# Altium PCB sensors_pcb.PcbDoc
Units mil, origin at the board's own origin, x right, y up, seen from the top; angles counter-clockwise.
Board outline 1491.26 x 1902.36 mil, 2 copper layers (Top Layer, Bottom Layer); 10 components, 10 nets, 27 pads, 0 vias.
Unrouted connection lines stored in the file: 14.
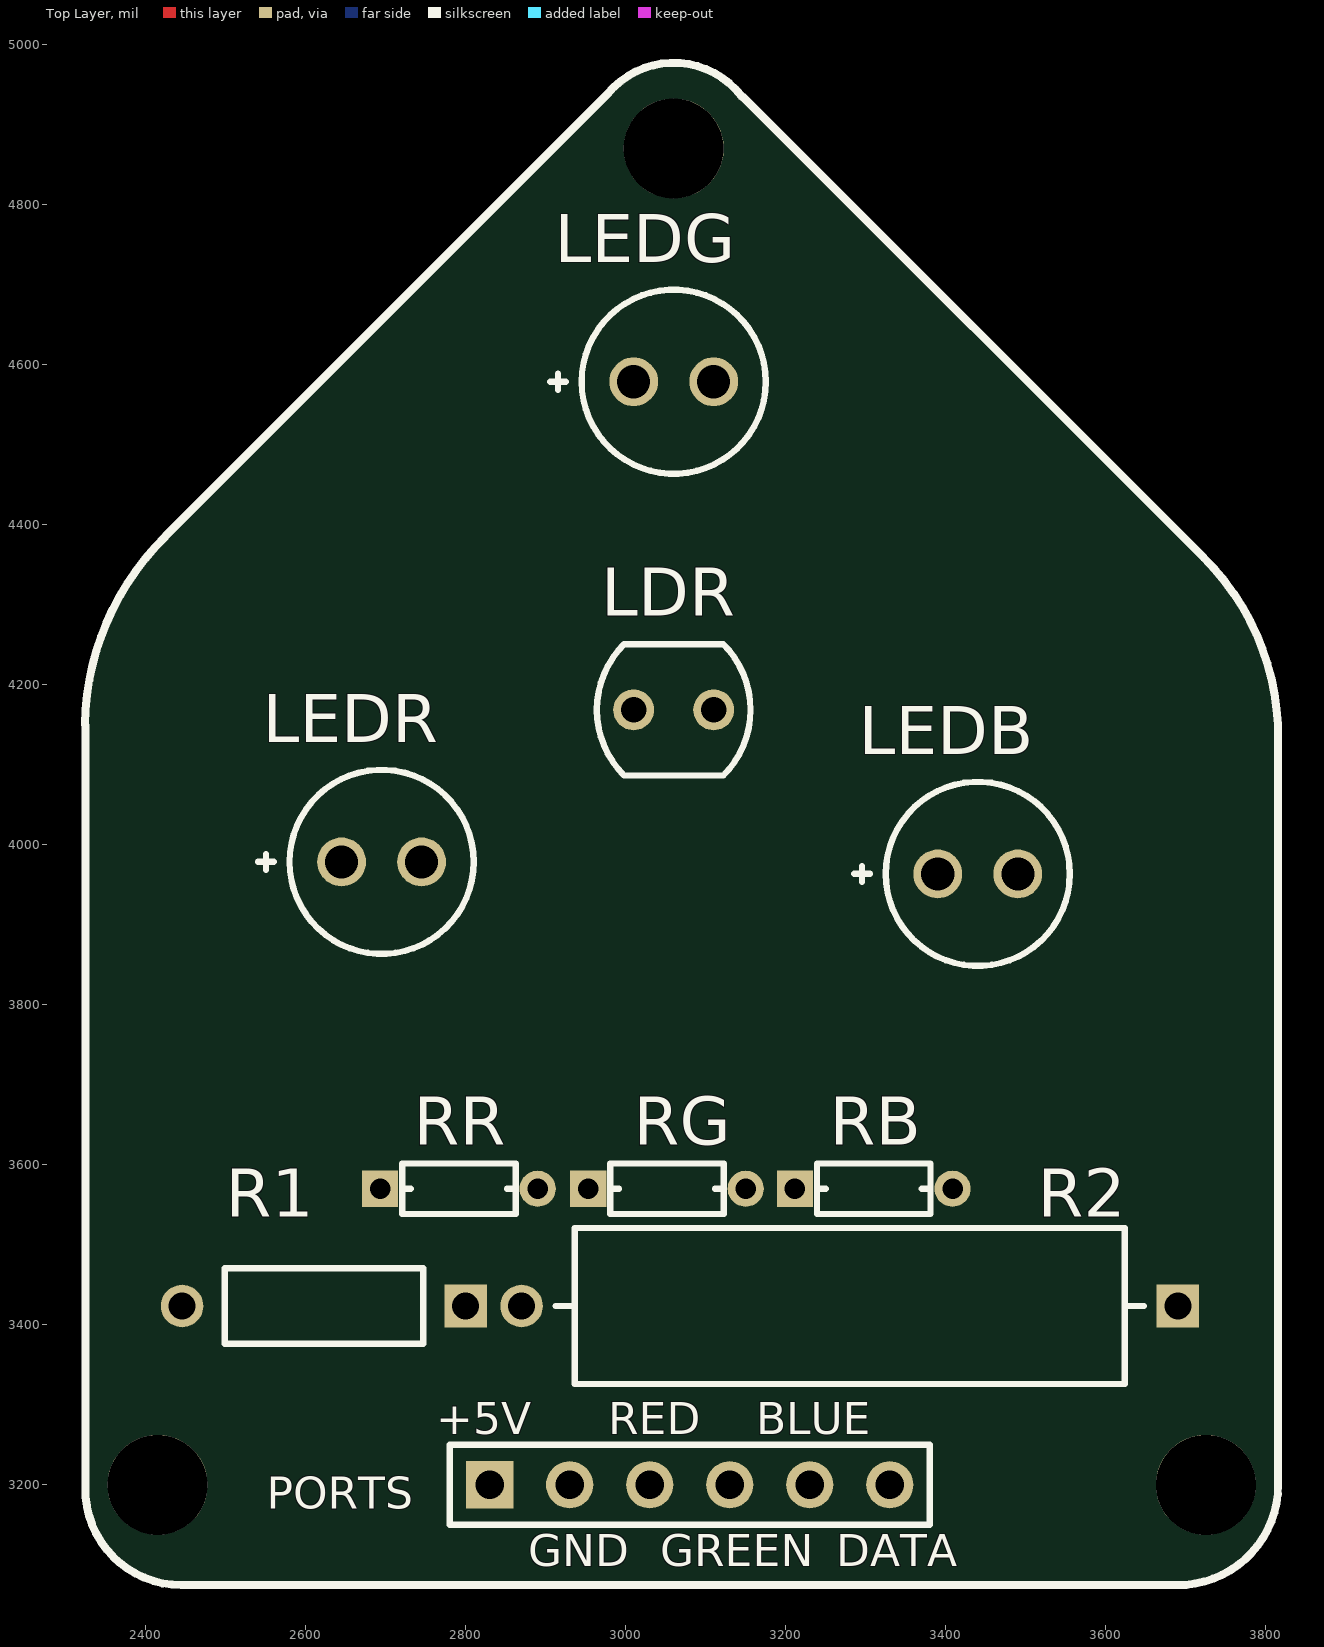
[diagram p0: Top Layer view]
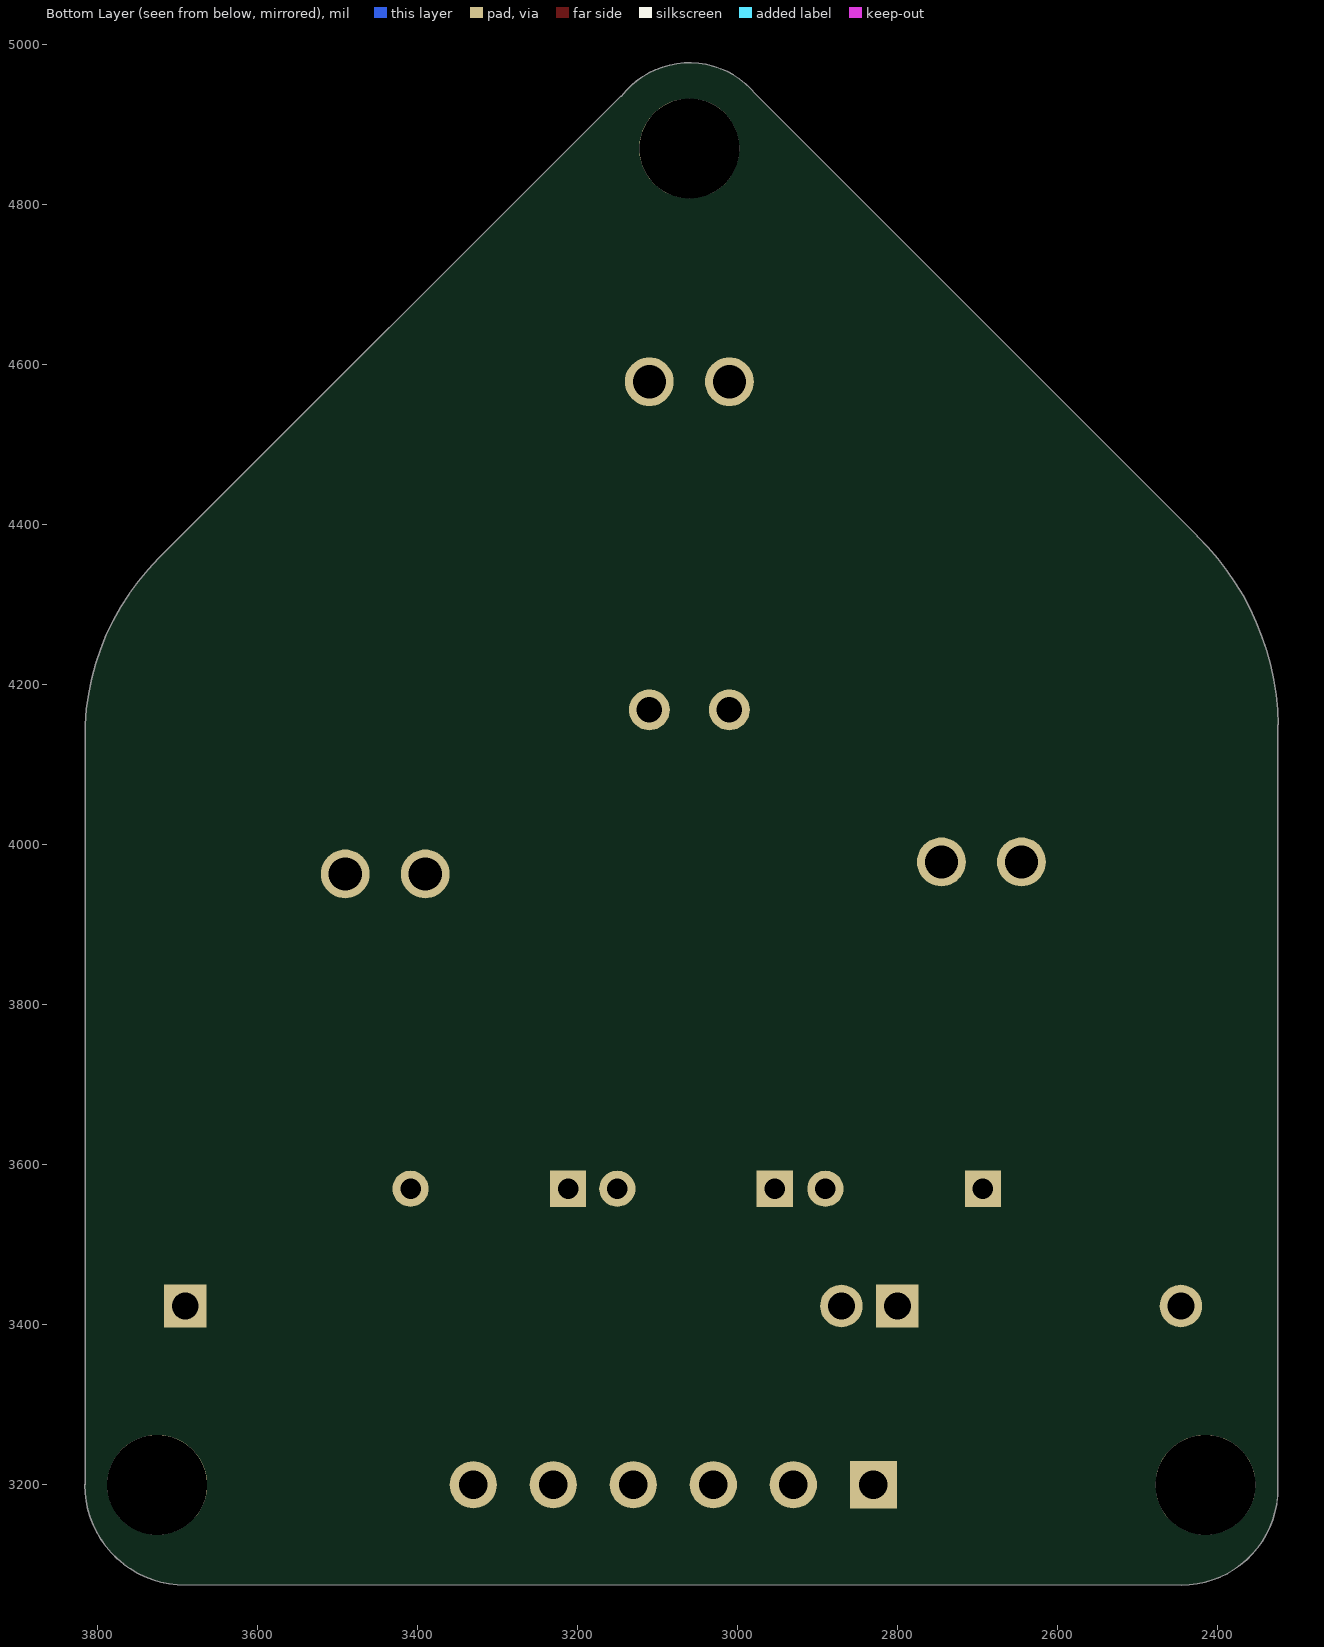
[diagram p1: Bottom Layer view, seen from below]

## Layer stack, top to bottom
Top Solder: solder mask 0.4, Solder Resist, Dk 3.5
Top Layer: signal copper 1.4
Dielectric 1: dielectric 12.6, FR-4, Dk 4.8
Bottom Layer: signal copper 1.4
Bottom Solder: solder mask 0.4, Solder Resist, Dk 3.5

## Board outline
2445,3074.58 cw(c2445,3195) 2325,3185 2325,4149.16 2324.14,4150.01 cw(c2660,4145) 2425,4385 2425,4385.62 2977.4,4938.02 cw(c3060,4870) 3145,4935 3145.98,4935 3722.99,4357.99 cw(c3500,4135) 3815,4150 3815,3200.4 3815.4,3200 cw(c3690,3200) 3700,3075

## Design rules (kind name [scope] priority, off if disabled: settings)
Clearance [All] p1: gap=10 ignorepadtopadclearanceinfootprint=FALSE except(0: Arc-Hole Track-Hole SMDPad-Hole THPad-Hole Via-Hole Fill-Hole Poly-Hole Region-Hole Text-Hole)
PolygonConnect [All] p1: connectstyle=Relief reliefconductorwidth=10 reliefentries=4 polygonreliefangle="90 Angle" airgapwidth=10
RoutingVias [All] p1: holewidth=28 width=50 viastyle="Through Hole" minholewidth=28 minwidth=50 maxholewidth=28 maxwidth=50
SolderMaskExpansion [All] p1: expansion=4 istentingtop=FALSE
Width [All] p1: maxlimit=10 minlimit=10 preferedwidth=10
30 further rules are at their usual default settings.

## Components (designator, comment, footprint, x,y, rotation, side; value= is the part's Value field where it differs from the comment)
LDR "VT90N1" EXCE-VT90N1 3060,4168.43 r0 top
LEDB "HLMP-4740" AVAG-HLMP-4740 3440,3963.43 r0 top
LEDG "HLMP-4740" AVAG-HLMP-4740 3060,4578.43 r0 top
LEDR "HLMP-4740" AVAG-HLMP-4740 2695,3978.43 r0 top
PORTS "Header 6" HDR1X6 2830,3200 r0 top (schematic designator P1)
R1 "MFR-25FBF52-475R" RESA60-630X240 2622.83,3423.43 r180 top (schematic designator "R1 3.01K")
R2 "RNC65H3011FRB14" FP-RNC65-MFG 3280,3423.43 r180 top value=3.01kΩ (schematic designator "R2 475R")
RB "MBA02040C2200FC100" FP-MBA0204-MFG 3310,3570 r0 top value=220Ω
RG "MBA02040C2200FC100" FP-MBA0204-MFG 3051.57,3570 r0 top value=220Ω
RR "MBA02040C2200FC100" FP-MBA0204-MFG 2791.57,3570 r0 top value=220Ω

## Footprints (in the part's own frame and the unit in brackets; to place one, negate y for a bottom-side part, rotate by r counter-clockwise, add the part's x,y. Pads: shape width x height; smd on the part's side, far side on the other; paste and mask are expansions set on the pad)
AVAG-HLMP-4740 [mm] "THD, 2-Leads, Dia 5.845mm, Pitch 2.54mm"
  round 1.55 hole 1.05: 1(-1.27,0) 2(1.27,0)
  silkscreen extent -3.92,-2.92 2.92,2.92
EXCE-VT90N1 [mm] "THD, 2-Leads, Body Width 4.17mm (Max), Height 2.29mm"
  round 1.3 hole 0.8: 1(-1.27,0) 2(1.27,0)
  silkscreen extent -2.44,-2.08 2.44,2.08, body extent -2.44,-2.09 2.44,2.09, height 2.29
FP-MBA0204-MFG [mm]
  rect 1.15x1.15 hole 0.65 paste-1000 mask+0: 1(-2.5,0)
  round 1.15 hole 0.65 paste-1000 mask+0: 2(2.5,0)
  silkscreen extent -1.8,-0.8 1.8,0.8, body extent -3.17,-0.9 3.17,0.9, height 0.25
FP-RNC65-MFG [mm]
  rect 1.35x1.35 hole 0.85 paste-1000 mask+0: 1(-10.415,0)
  round 1.35 hole 0.85 paste-1000 mask+0: 2(10.415,0)
  silkscreen extent -9.34,-2.47 9.34,2.47, body extent -11.19,-2.58 11.19,2.58, height 0.25
HDR1X6 [mm] "Connector; Header; 6 Position"
  rect 1.5x1.5 hole 0.9: 1(0,0)
  round 1.5 hole 0.9: 2(2.54,0) 3(5.08,0) 4(7.62,0) 5(10.16,0) 6(12.7,0)
  silkscreen extent -1.27,-1.27 13.97,1.27
RESA60-630X240 [mm] "Axial Resistor, 2-Leads, Dia 2.4mm, Body Length 6.3mm"
  rect 1.35x1.35 hole 0.85: 1(-4.5,0)
  round 1.35 hole 0.85: 2(4.5,0)
  silkscreen extent -3.15,-1.2 3.15,1.2, body extent -3.15,-1.2 3.15,1.2, height 2.4

## Part data
LDR: library part CMP-2000-07406-1, "Photoconductive Resistor, 200 kOhm, 100 V, 80 mW, -40 to 75 degC, 2-Pin THD, RoHS", Dark Resistance=200kohm, Manufacturer="Excelitas Technology", Operating Temperature Max=75°C, Operating Temperature Min=-40°C, Package Description="2-Pin Through Hole Device, Body Width 4.17 mm (Max), Height 2.29 mm", Power Rating=80mW, Resistance @ Lux=12kohm, Resistor Case Style=-, Voltage Rating=100V, Datasheet URL=http://datasheet.octopart.com/VT90N1-Excelitas-datasheet-10388451.pdf, Datasheet Version=09/2006, Manufacturer URL=http://www.excelitas.com/Pages/Index.aspx, Mounting Technology=ThroughHole, Package Reference=VT90N1, Packaging=Each, Product Range=-, SVHC=Cadmiumchloride(15-Jun-2015)
LEDB LEDG LEDR: library part CMP-2000-06413-1, "T-1 3/4 (5 mm) Low Current LED Lamp, Green, 1.9 V, -20 to 100 degC, 2-Pin THD, RoHS, Bulk", Color=Green, Dominant Wavelength/Color Temperature=569nm, Manufacturer=AvagoTechnologies, Package=2T-13/4, Package Description="2-Pin Through Hole Device, Dia 5.845 mm, Pitch 2.54 mm", Category=LEDs, Datasheet URL=http://docs.avagotech.com/docs/AV02-1557EN, Datasheet Version=07/2014, Intensity=2.3mcd, Lens Appearance=ColoredDiffused, Lens Shape Type=Circular, Manufacturer URL=http://www.avagotech.com/, Mounting=ThroughHole, Mounting Orientation=TopMount, Mounting Technology=ThroughHole, Number of LEDs=1, Package Reference=HLMP-4740, Packaging=Bulk, Peak Wavelength=565nm, Pin Count=2, Rad Hard=No, Type=Uni-Color, Viewing Angle=50°
PORTS: "Header, 6-Pin", LatestRevisionDate=17-Jul-2002, LatestRevisionNote="Re-released for DXP Platform.", Publisher="Altium Limited"
R1: library part CMP-1659-00068-1, "Axial Resistor, 475 Ohm, +/- 1%, 0.25 W, -55 to 155 degC, 2-Pin THD, RoHS, Bulk", Case\Package=LQFP, Frequency="100 MHz", Max Operating Temperature="85 degC", Max Power Dissipation="1.5 W", Max Supply Voltage="3.6 V", Min Operating Temperature="-40 degC", Min Supply Voltage="2.4 V", Nominal Supply Voltage="3.3 V", Package Quantity=90, ADC Channels=8, ComponentLink1Description="Manufacturer URL", ComponentLink1URL=http://www.yageo.com/, ComponentLink2Description=Datasheet, ComponentLink2URL=http://www.yageo.com/documents/recent/Yageo%20LR_MFR_2013.pdf, DatasheetVersion=Apr-13, Density="512 KB", Ethernet Channels=1, Height="1.45 mm", I\Os=70, Interface=UART, Length="14.1 mm", Max Clock Frequency="100 MHz", Mount="Surface Mount", PackageDescription="2-Pin Axial Lead, Dia 2.4 mm, Body Length 6.3 mm", PackageReference=MFR-25, Packaging=Tray, Pins=100, PWM Channels=7, Radiation Hardening=No, RAM Size="64 KB", REACH SVHC="No SVHC", RoHSCompliant=true, UART Channels=4, Width="14.1 mm"
R2: library part CMP-02408-000008-1, "Res Metal Film 3.01K Ohm 1% 0.5W(1/2W) ±50ppm/C 0.01% Epoxy AXL T/R", Manufacturer=Vishay, Package=RNC65, Power Rating=0.5W, Resistance=3.01kΩ, Temperature="-65°C to +175°C", Temperature Coefficient=50ppm/°C, Temperature Range High=+175°C, Temperature Range Low=-65°C, Tolerance=1%, Voltage Rating=300V, Automotive=No, Category=Res, ComponentLink2Description=Datasheet, ComponentLink2URL=https://www.vishay.com/docs/31025/erc.pdf, Composition="Metal Film", Device Class L1="Passive Components", Device Class L2=Resistors, Device Class L3="Through-Hole Resistors", Height=4.95mm, Ipc Land Pattern Name=RESAD2083W85L1745D495, Lead Free=Yes, Manufacturer Part Number=RNC65H3011FRB14, Military Standard=true, Octopart=https://octopart.com/rnc65h3011frb14-vishay-40281131, RoHS=TRUE, Series=RNC
RB RG RR: library part CMP-02408-000005-1, "RES 220 OHM 0.4W 1% AXIAL", Manufacturer="Vishay BC Components", Package=MBA0204, Power Rating=0.25W, Resistance=220Ω, Temperature="-55°C to +125°C", Temperature Coefficient=50ppm/°C, Temperature Range High=+125°C, Temperature Range Low=-55°C, Tolerance=1%, Voltage Rating=200V, Automotive=Yes, Automotive Grade="Grade 1", Category=Res, ComponentLink2Description=Datasheet, ComponentLink2URL=http://www.vishay.com/docs/28766/mbxsma.pdf, Composition="Metal Film", Device Class L1="Passive Components", Device Class L2=Resistors, Device Class L3="Through-Hole Resistors", Digikey Description="RES 220 OHM 0.4W 1% AXIAL", Height=1.6mm, Ipc Land Pattern Name=RESAD500W65L360D160, Lead Free=Yes, Manufacturer Part Number=MBA02040C2200FC100, Mouser Description="Thin Film Resistors - Through Hole .4watt 220ohms 1% 1/8watt body size", Octopart=https://octopart.com/mba02040c2200fc100-vishay-43743094, RoHS=TRUE, Series="MBA/SMA 0204"

## Free pads (board coordinates)
  round 125 hole 125: 15(3060,4870) 16(3725,3200) 17(2415,3200)

## Nets (pads, with @x,y where several pads share a name; then routed paths per layer and width w, separated by ;. In a path a pad name is that pad's centre, name@x,y a point inside that pad or via, vN(x,y) a via of type N, cw(c..) or ccw(c..) an arc to the next point about the centre after c; other vN are vias at no path point)
+5V: LDR.2 PORTS.1
BLUE: PORTS.5 RB.2
DATA: LDR.1 PORTS.6 R1.2
GND: LEDB.2 LEDG.2 LEDR.2 PORTS.2 R2.1
GREEN: PORTS.4 RG.2
NetLEDB_1: LEDB.1 RB.1
NetLEDG_1: LEDG.1 RG.1
NetLEDR_1: LEDR.1 RR.1
"NetR1 3.01K_1": R1.1 R2.2
RED: PORTS.3 RR.2

## Silkscreen, mask and mechanical layers (free items; w line width, h text height)
Top Overlay:
  lines w10: 2324.14,4150.01 cw(c2660,4145) 2425,4385 2425,4385.62 2977.4,4938.02 cw(c3060,4870) 3145,4935 3145.98,4935 3722.99,4357.99 cw(c3500,4135) 3815,4150 3815,3200.4 ; 2325,4149.16 2325,3185 ccw(c2445,3195) 2445,3074.58 ; 2445.42,3075 3700,3075 ccw(c3690,3200) 3815.4,3200
  text "+5V" at 2763,3263 h40
  text "RED" at 2978,3263 h40
  text "BLUE" at 3163,3263 h40
  text "GND" at 2878,3098 h40
  text "GREEN" at 3043,3098 h40
  text "DATA" at 3263,3098 h40